# Altium PCB BACK-LIGHT-II.PcbDoc
Units mm, origin at the board's own origin, x right, y up, seen from the top; angles counter-clockwise.
Board outline 91 x 91 mm, 2 copper layers (Top Layer, Bottom Layer), stack 1.571 mm thick; 40 components, 42 nets, 87 pads, 15 vias.
Unrouted connection lines stored in the file: 23.
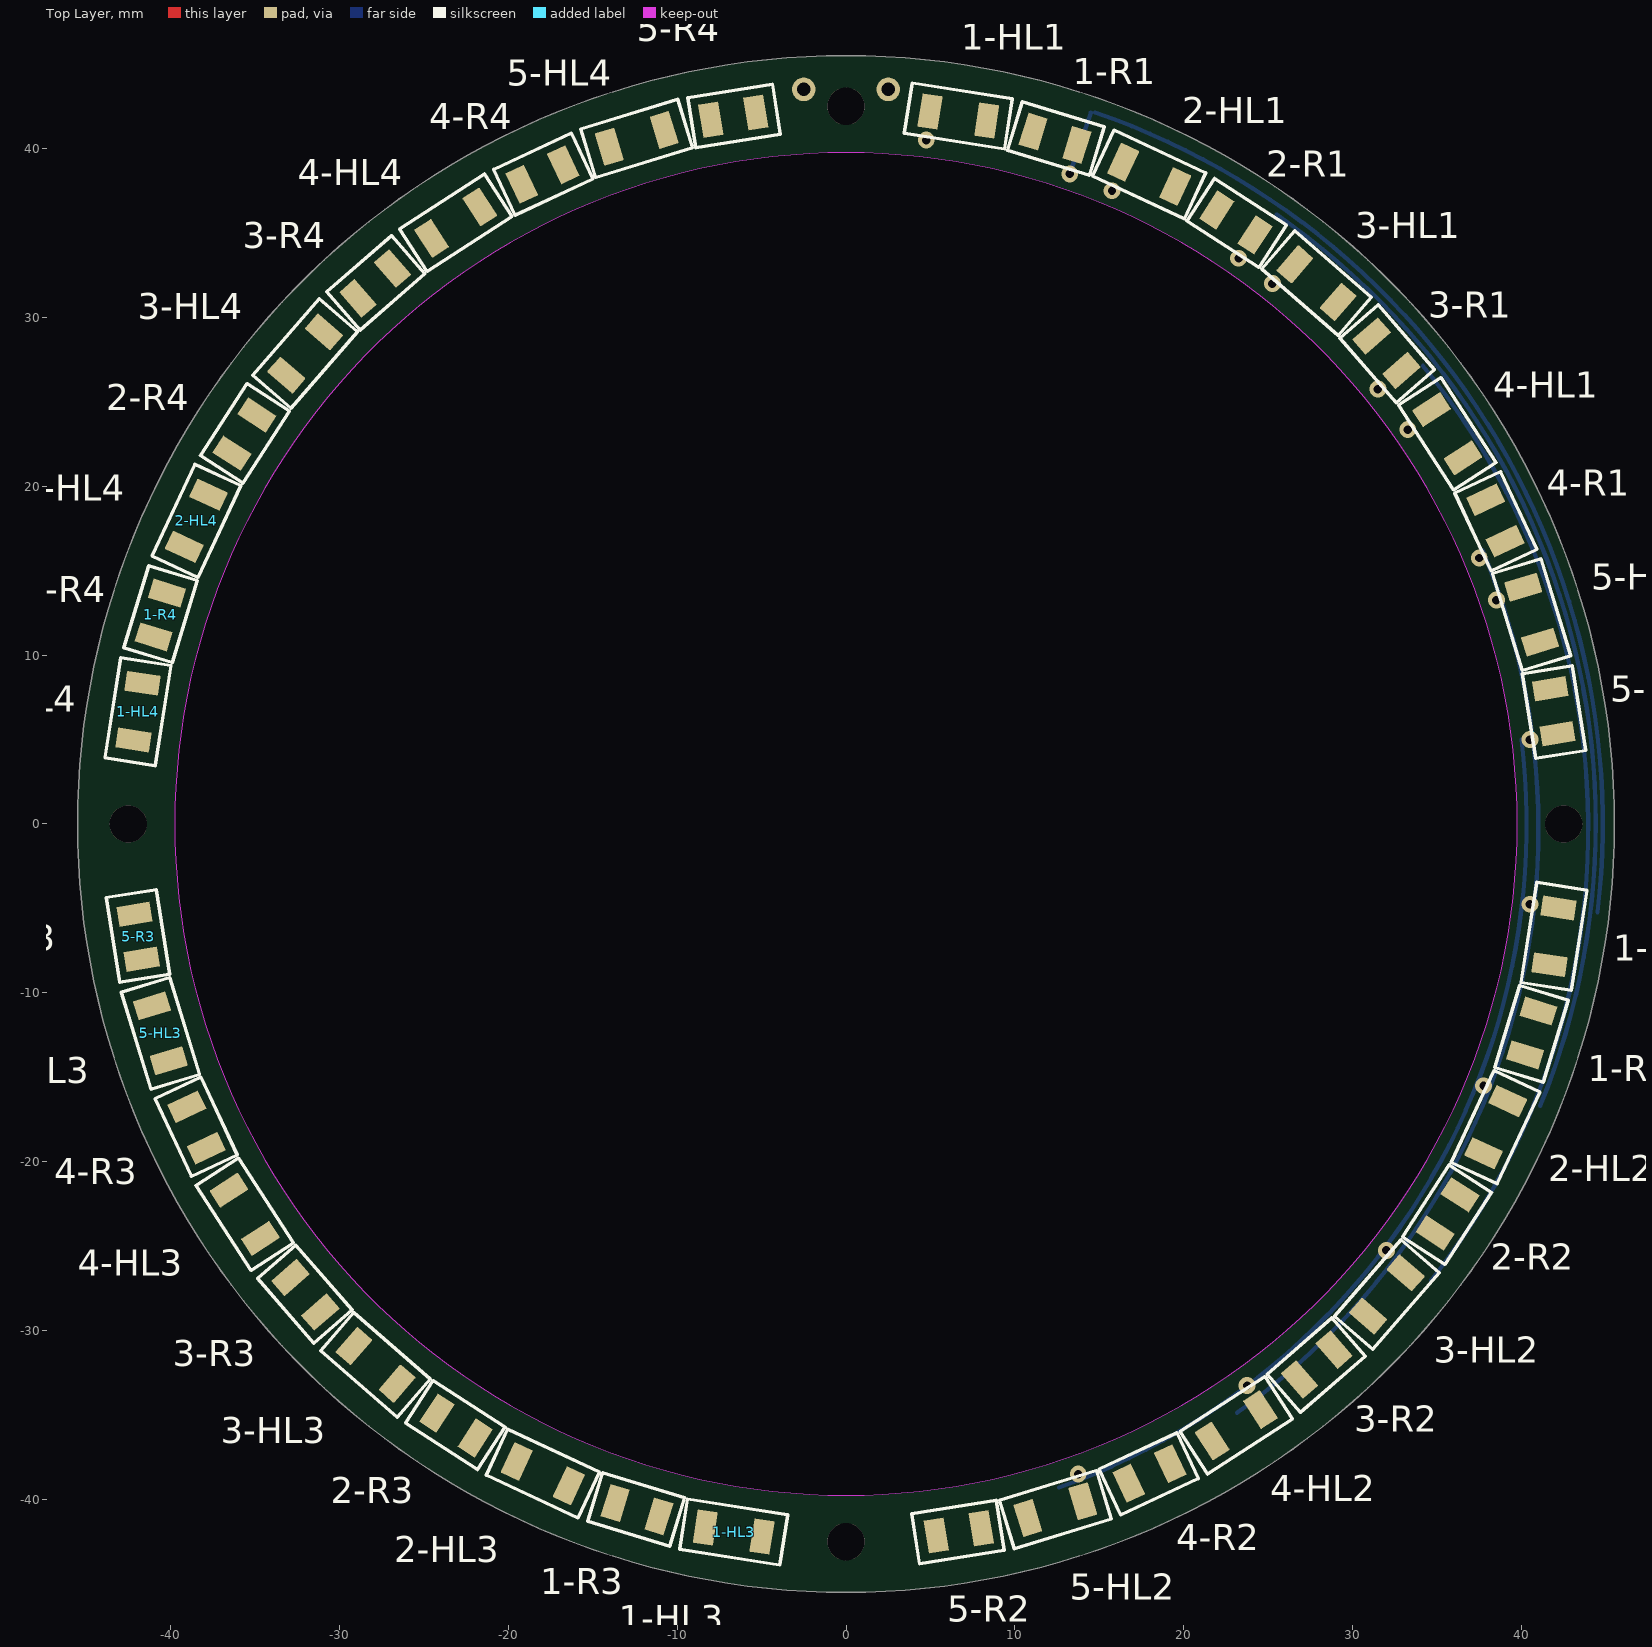
[diagram p0: Top Layer view]
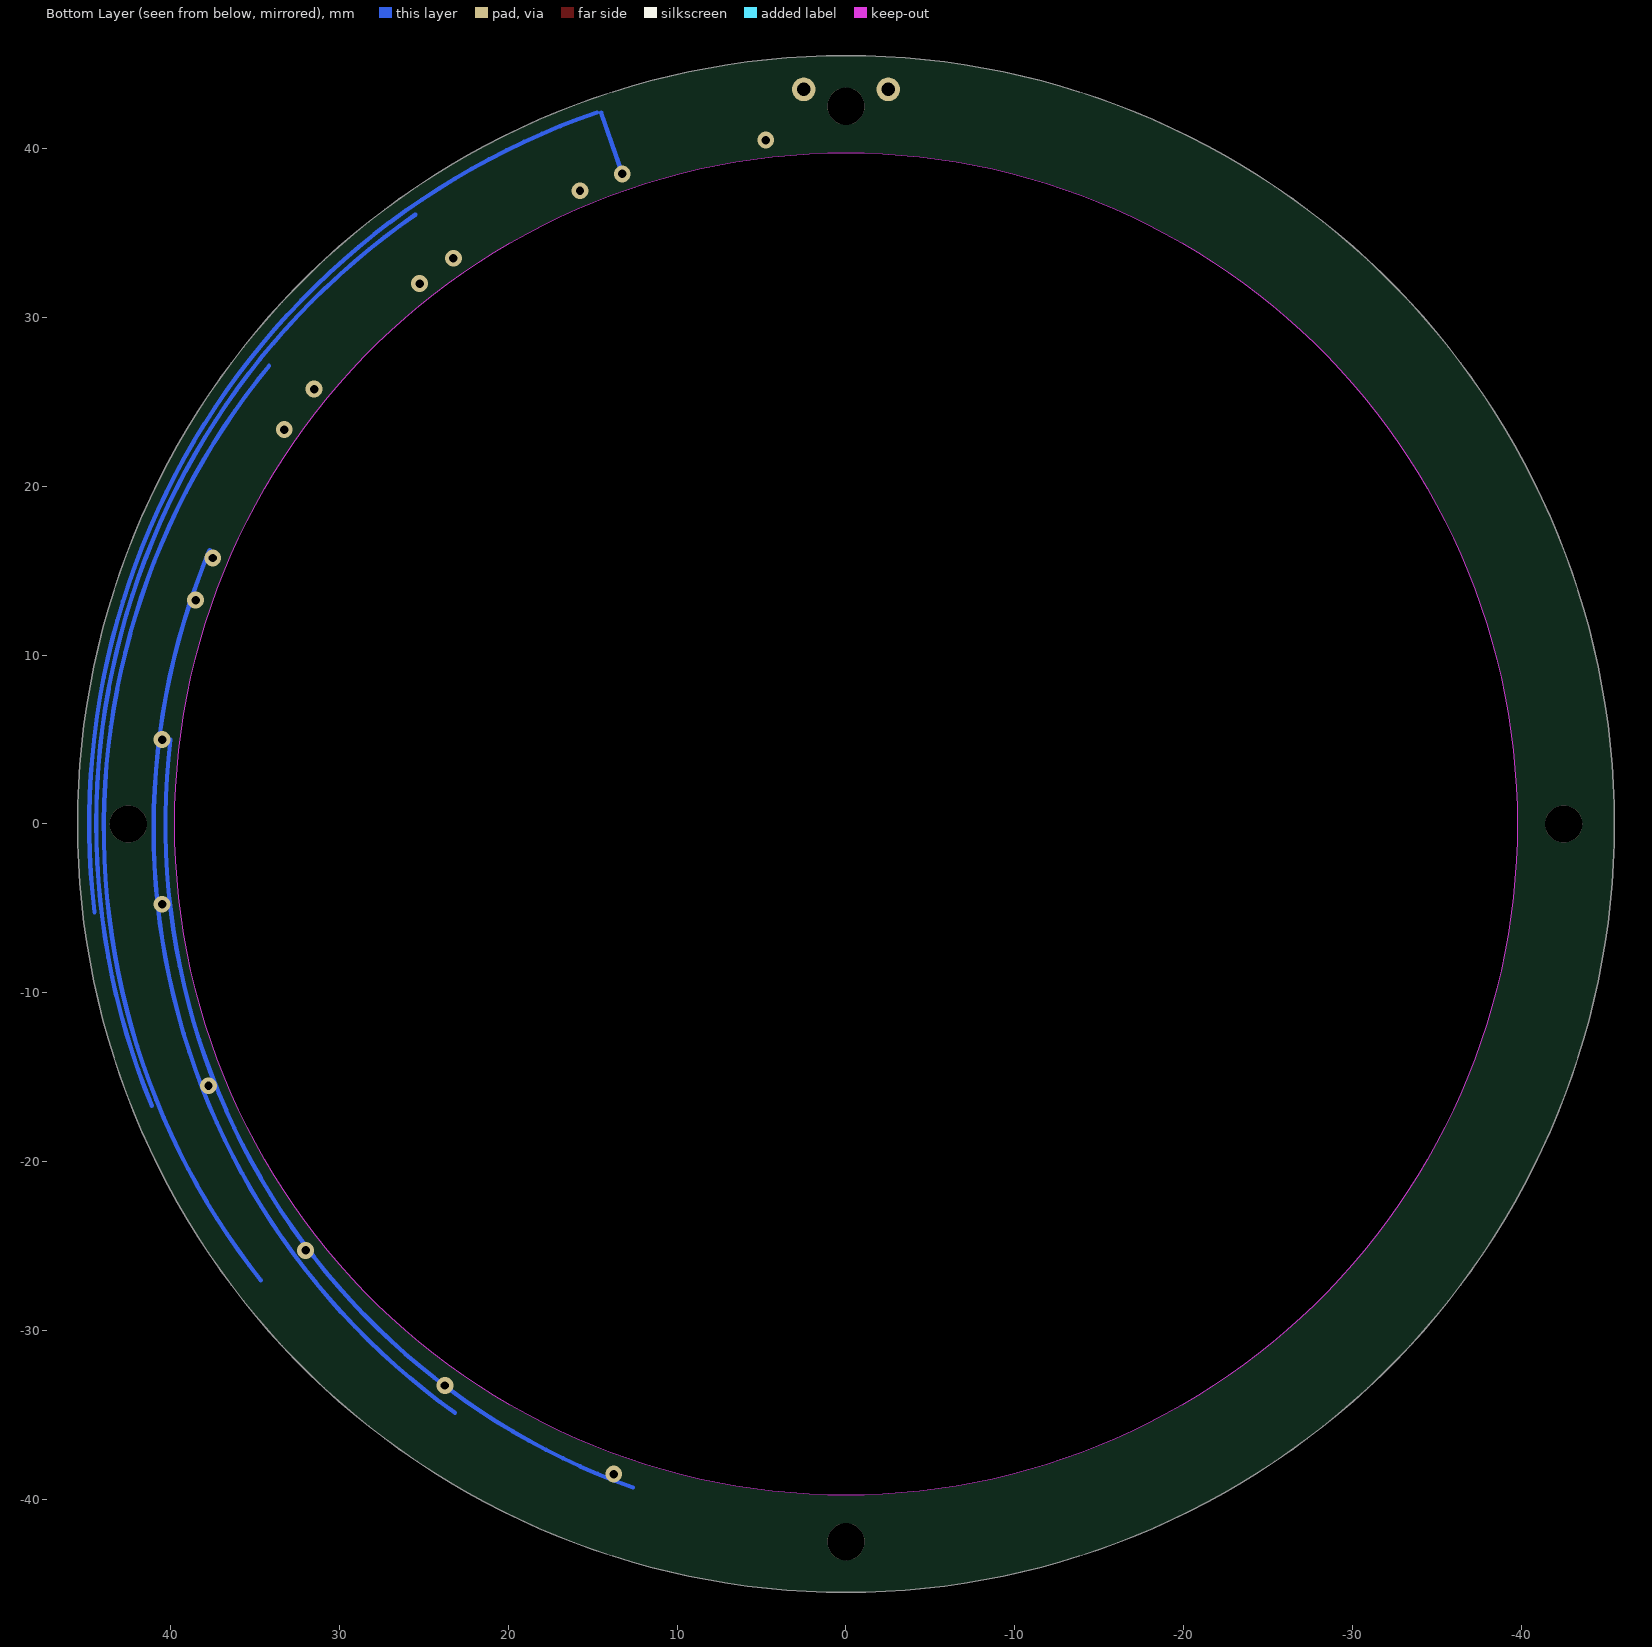
[diagram p1: Bottom Layer view, seen from below]

## Layer stack, top to bottom
Top Solder: solder mask 0.0102, Solder Resist, Dk 3.5
Top Layer: signal copper 0.0356
Dielectric 1: dielectric 1.5, FR-4, Dk 4.8
Bottom Layer: signal copper 0.0356
Bottom Solder: solder mask 0.0102, Solder Resist, Dk 3.5

## Board outline
-45.5,0 ccw(c0,0) 0,-45.5 ccw(c0,0) 45.5,0 ccw(c0,0) 0,45.5 ccw(c0,0)
cut-out: -39.75,0 ccw(c0,0) 0,-39.75 ccw(c0,0) 39.75,0 ccw(c0,0) 0,39.75 ccw(c0,0)

## Design rules (kind name [scope] priority, off if disabled: settings)
Clearance [All] p1: gap=0.254 ignorepadtopadclearanceinfootprint=FALSE except(0: Arc-Hole Track-Hole SMDPad-Hole THPad-Hole Via-Hole Fill-Hole Poly-Hole Region-Hole Text-Hole)
PlaneConnect [All] p1: planeconnectstyle=Direct reliefexpansion=0.508 reliefentries=4 reliefconductorwidth=0.254 reliefairgap=0.254
PolygonConnect PolygonConnect_1 [ISVIA] p1: connectstyle=Direct reliefconductorwidth=0.254 reliefentries=4 polygonreliefangle="90 Angle" airgapwidth=0.254
PolygonConnect [All] p2: connectstyle=Relief reliefconductorwidth=0.5 reliefentries=4 polygonreliefangle="90 Angle" airgapwidth=0.3
RoutingVias [All] p1: holewidth=0.8 width=1.5 viastyle="Through Hole" minholewidth=0.8 minwidth=1.5 maxholewidth=0.8 maxwidth=1.5
SolderMaskExpansion [All] p1: expansion=0.102
Width [All] p1: maxlimit=1 minlimit=0.2 preferedwidth=0.5
29 further rules are at their usual default settings.

## Classes and differential pairs
component class BACK-LIGHT-II: 1-HL1 1-HL3 1-HL4 1-HL5 1-R1 1-R3 2-HL1 2-HL2 2-HL4 2-HL5 2-R1 2-R2 2-R4 3-HL2 3-HL3 3-HL4 3-HL5 3-R2 3-R3 4-HL4 4-HL5 4-R1 4-R3 4-R4 5-R1 5-R2 5-R3 5-R4

## Components (designator, comment, footprint, x,y, rotation, side; value= is the part's Value field where it differs from the comment)
1-HL1 "FYLS-1206UWC" "LED 1206" 6.654,41.925 r351 top value=3K*
1-HL2 "FYLS-1206UWC" "LED 1206" 41.925,-6.654 r261 top value=3K* (schematic designator 2-HL1)
1-HL3 "FYLS-1206UWC" "LED 1206" -6.654,-41.925 r171 top value=3K* (schematic designator 3-HL1)
1-HL4 "FYLS-1206UWC" "LED 1206" -41.925,6.654 r81 top value=3K* (schematic designator 4-HL1)
1-R1 "3K*" RC1206 12.424,40.591 r343 top
1-R2 "3K*" RC1206 40.591,-12.424 r253 top (schematic designator 2-R1)
1-R3 "3K*" RC1206 -12.424,-40.591 r163 top (schematic designator 3-R1)
1-R4 "3K*" RC1206 -40.591,12.424 r73 top (schematic designator 4-R1)
2-HL1 "FYLS-1206UWC" "LED 1206" 17.952,38.467 r335 top value=3K* (schematic designator 1-HL2)
2-HL2 "FYLS-1206UWC" "LED 1206" 38.467,-17.952 r245 top value=3K*
2-HL3 "FYLS-1206UWC" "LED 1206" -17.952,-38.467 r155 top value=3K* (schematic designator 3-HL2)
2-HL4 "FYLS-1206UWC" "LED 1206" -38.467,17.952 r65 top value=3K* (schematic designator 4-HL2)
2-R1 "3K*" RC1206 23.131,35.594 r327 top (schematic designator 1-R2)
2-R2 "3K*" RC1206 35.594,-23.131 r237 top
2-R3 "3K*" RC1206 -23.131,-35.594 r147 top (schematic designator 3-R2)
2-R4 "3K*" RC1206 -35.594,23.131 r57 top (schematic designator 4-R2)
3-HL1 "FYLS-1206UWC" "LED 1206" 27.86,32.028 r319 top value=3K* (schematic designator 1-HL3)
3-HL2 "FYLS-1206UWC" "LED 1206" 32.028,-27.86 r229 top value=3K* (schematic designator 2-HL3)
3-HL3 "FYLS-1206UWC" "LED 1206" -27.86,-32.028 r139 top value=3K*
3-HL4 "FYLS-1206UWC" "LED 1206" -32.028,27.86 r49 top value=3K* (schematic designator 4-HL3)
3-R1 "3K*" RC1206 32.046,27.839 r311 top (schematic designator 1-R3)
3-R2 "3K*" RC1206 27.839,-32.046 r221 top (schematic designator 2-R3)
3-R3 "3K*" RC1206 -32.046,-27.839 r131 top
3-R4 "3K*" RC1206 -27.839,32.046 r41 top (schematic designator 4-R3)
4-HL1 "FYLS-1206UWC" "LED 1206" 35.609,23.109 r303 top value=3K* (schematic designator 1-HL4)
4-HL2 "FYLS-1206UWC" "LED 1206" 23.109,-35.609 r213 top value=3K* (schematic designator 2-HL4)
4-HL3 "FYLS-1206UWC" "LED 1206" -35.609,-23.109 r123 top value=3K* (schematic designator 3-HL4)
4-HL4 "FYLS-1206UWC" "LED 1206" -23.109,35.609 r33 top value=3K*
4-R1 "3K*" RC1206 38.478,17.928 r295 top (schematic designator 1-R4)
4-R2 "3K*" RC1206 17.928,-38.478 r205 top (schematic designator 2-R4)
4-R3 "3K*" RC1206 -38.478,-17.928 r115 top (schematic designator 3-R4)
4-R4 "3K*" RC1206 -17.928,38.478 r25 top
5-HL1 "FYLS-1206UWC" "LED 1206" 40.599,12.398 r287 top value=3K* (schematic designator 1-HL5)
5-HL2 "FYLS-1206UWC" "LED 1206" 12.398,-40.599 r197 top value=3K* (schematic designator 2-HL5)
5-HL3 "FYLS-1206UWC" "LED 1206" -40.599,-12.398 r107 top value=3K* (schematic designator 3-HL5)
5-HL4 "FYLS-1206UWC" "LED 1206" -12.398,40.599 r17 top value=3K* (schematic designator 4-HL5)
5-R1 "3K*" RC1206 41.929,6.627 r279 top
5-R2 "3K*" RC1206 6.627,-41.929 r189 top
5-R3 "3K*" RC1206 -41.929,-6.627 r99 top
5-R4 "3K*" RC1206 -6.627,41.929 r9 top

## Footprints (in the part's own frame and the unit in brackets; to place one, negate y for a bottom-side part, rotate by r counter-clockwise, add the part's x,y. Pads: shape width x height; smd on the part's side, far side on the other; paste and mask are expansions set on the pad)
"LED 1206" [mm] "Chip Resistor, 2-Leads, Body 6,30x3,20mm, IPC Low Density"
  rrect10% 1.2x2 smd: 1(-1.7,0) 2(1.7,0)
  silkscreen extent -3,-1.5 3,1.5, body extent -1.65,-0.81 1.55,0.79, height 1.1
RC1206 [mm] "Chip Resistor, 2-Leads, Body 6,30x3,20mm, IPC Low Density"
  rrect3% 1.2x2 smd: 1(-1.4,0) 2(1.3,0)
  silkscreen extent -2.54,-1.5 2.54,1.5, body extent -1.53,-0.8 1.53,0.8, height 0.5

## Part data
1-HL1 1-HL2 1-HL3 1-HL4 2-HL1 2-HL2 2-HL3 2-HL4 3-HL1 3-HL2 3-HL3 3-HL4 4-HL1 4-HL2 4-HL3 4-HL4 5-HL1 5-HL2 5-HL3 5-HL4: library part LED, "Светодиод", Manufacturer=3K*, ManufacturerPartNumber=3K*, Part Number=3K*, Power/Voltage=3K*, Rem=3K*, TKE=3K*, Tolerance=3K*, Корпус=3K*, Примечание=3K*
1-R1 1-R2 1-R3 1-R4 2-R1 2-R2 2-R3 2-R4 3-R1 3-R2 3-R3 3-R4 4-R1 4-R2 4-R3 4-R4 5-R1 5-R2 5-R3 5-R4: library part RES, "Постоянный углеродистый резистор", Manufacturer=3K*, ManufacturerPartNumber=3K*, Part Number=3K*, Power/Voltage=3K*, Rem=3K*, TKE=3K*, Tolerance=3K*, Type=3K*

## Free pads (board coordinates)
  round 1.4 hole 0.8: 8(-2.5,43.5) 8(2.5,43.5)
  round 2.2 hole 2.2 unplated: MH(-42.5,0) MH(0,-42.5) MH(0,42.5) MH(0,42.5) MH(42.5,0)

## Via types
v1: diameter 1, hole 0.5, Top Layer to Bottom Layer, 15 vias

## Nets (pads, with @x,y where several pads share a name; then routed paths per layer and width w, separated by ;. In a path a pad name is that pad's centre, name@x,y a point inside that pad or via, vN(x,y) a via of type N, cw(c..) or ccw(c..) an arc to the next point about the centre after c; other vN are vias at no path point)
L+: 1-HL1.1 2-HL1.1 3-HL1.1 4-HL1.1 5-HL1.1 pad.8@2.5,43.5
  other v1: 38.509,13.26 33.263,23.35 25.25,32 15.75,37.5 4.75,40.5
L-: 1-R4.2 pad.8@-2.5,43.5
Net1-HL1_2: 1-HL1.2 1-R1.1
Net1-HL2_1: 1-HL2.1 1-R1.2 | length 292.1
  Bottom Layer w0.254: 12.612,-39.294 ccw(c-1.397,-0.018) 40,5 ; 14.751,42.135 cw(c0.25,0) 44.503,-5.221 ; 23.155,-34.867 ccw(c-1.5,-0.25) 37.679,16.22 ; 25.488,36.094 cw(c0.5,0) 41.104,-16.69 ; 34.163,27.133 cw(c0.75,-0.25) 34.657,-27.019
  other v1: 40.5,-4.75 13.25,38.5
Net1-HL2_2: 1-HL2.2 1-R2.1
Net1-HL3_1: 1-HL3.1 1-R2.2
Net1-HL3_2: 1-HL3.2 1-R3.1
Net1-HL4_1: 1-HL4.1 1-R3.2
Net1-HL4_2: 1-HL4.2 1-R4.1
Net1-HL5_1: 
Net2-HL1_2: 
Net2-HL2_1: 
Net2-HL2_2: 
Net2-HL3_1: 
Net2-HL3_2: 
Net2-HL4_1: 
Net2-HL4_2: 
Net2-HL5_1: 
Net3-HL1_2: 
Net3-HL2_1: 
Net3-HL2_2: 
Net3-HL3_1: 
Net3-HL3_2: 
Net3-HL4_1: 
Net3-HL4_2: 
Net3-HL5_1: 
Net4-HL1_2: 
Net4-HL2_1: 
Net4-HL2_2: 
Net4-HL3_1: 
Net4-HL3_2: 
Net4-HL4_1: 
Net4-HL4_2: 
Net4-HL5_1: 
Net5-HL1_2: 
Net5-HL2_1: 
Net5-HL2_2: 
Net5-HL3_1: 
Net5-HL3_2: 
Net5-HL4_1: 
Net5-HL4_2: 
Net5-HL5_1: 
pads on no net: 2-HL1.2 2-HL2.1 2-HL2.2 2-HL3.1 2-HL3.2 2-HL4.1 2-HL4.2 2-R1.1 2-R1.2 2-R2.1 2-R2.2 2-R3.1 2-R3.2 2-R4.1 2-R4.2 3-HL1.2 3-HL2.1 3-HL2.2 3-HL3.1 3-HL3.2 3-HL4.1 3-HL4.2 3-R1.1 3-R1.2 3-R2.1 3-R2.2 3-R3.1 3-R3.2 3-R4.1 3-R4.2 4-HL1.2 4-HL2.1 4-HL2.2 4-HL3.1 4-HL3.2 4-HL4.1 4-HL4.2 4-R1.1 4-R1.2 4-R2.1 4-R2.2 4-R3.1 4-R3.2 4-R4.1 4-R4.2 5-HL1.2 5-HL2.1 5-HL2.2 5-HL3.1 5-HL3.2 5-HL4.1 5-HL4.2 5-R1.1 5-R1.2 5-R2.1 5-R2.2 5-R3.1 5-R3.2 5-R4.1 5-R4.2
copper on no net: | length 3.8
  Bottom Layer w0.254: 13.25,38.5 14.501,42.134
  other v1: 13.75,-38.5 23.75,-33.25 32,-25.25 37.75,-15.5 40.5,5 37.5,15.75 31.5,25.75 23.25,33.5

## Silkscreen, mask and mechanical layers (free items; w line width, h text height)
Mechanical 4:
  circle w0.1: c0,0 r39.75
  circle w0.1: c0,0 r45.5